# Altium PCB mergedPCBs.PcbDoc (part 3 of 4)
Units mil, origin at the board's own origin, x right, y up, seen from the top; angles counter-clockwise.
Board outline 7880 x 8510 mil, 2 copper layers (Top Layer, Bottom Layer); 381 components, 0 nets, 1142 pads, 205 vias.
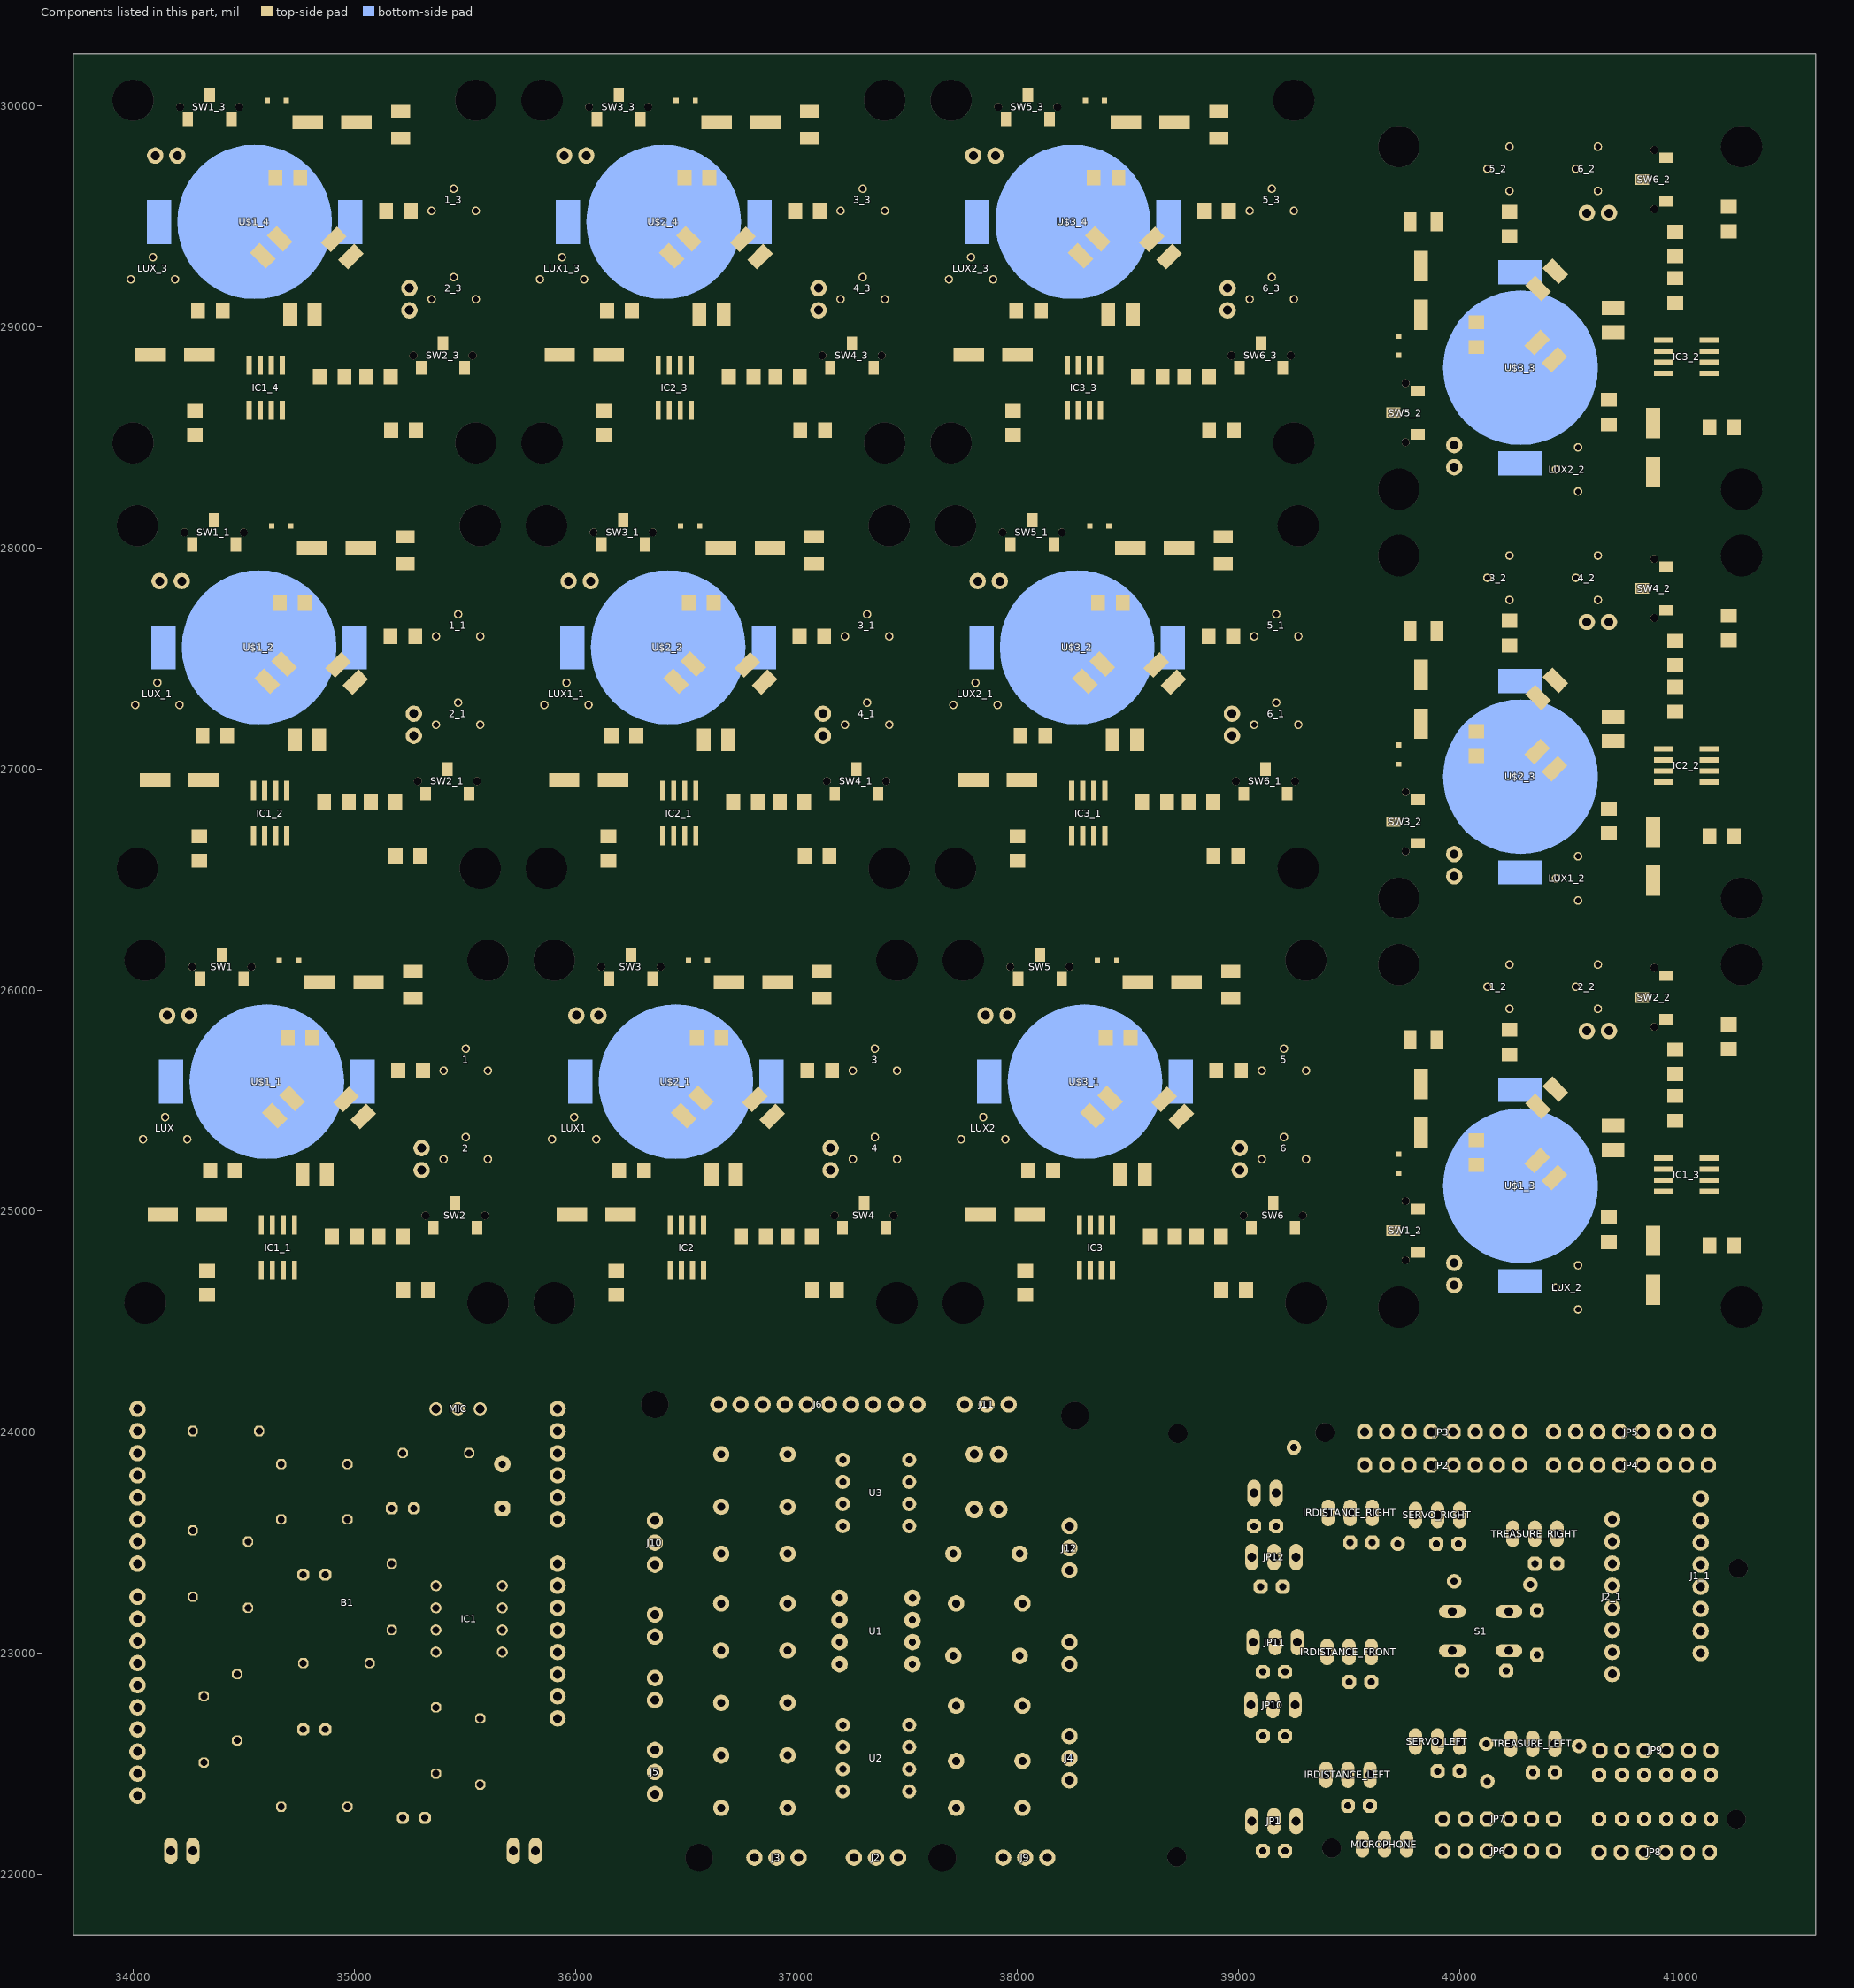
[diagram p3: the components of this part, seen from the top]

## Via types
v1: diameter 41.59/41.59 (per signal layer), hole 25.59, Top Layer to Bottom Layer, 168 vias
v2: diameter 34/34 (per signal layer), hole 20, Top Layer to Bottom Layer, 25 vias
v3: diameter 53.15/66 (per signal layer), hole 35.43, Top Layer to Bottom Layer, 12 vias

## Nets (pads, with @x,y where several pads share a name; then routed paths per layer and width w, separated by ;. In a path a pad name is that pad's centre, name@x,y a point inside that pad or via, vN(x,y) a via of type N, cw(c..) or ccw(c..) an arc to the next point about the centre after c; other vN are vias at no path point) (continued)
copper on no net: (continued)
  Top Layer w24: 33990,29215 34090,29315 34190,29315 34300,29425 34400,29425 34550,29575 ; v1(34000,28975) 34079.76,28895.24 ; 34010,27290 34110,27390 34210,27390 34320,27500 34420,27500 34570,27650 ; v1(34020,27050) 34099.76,26970.24 ; 34045,25325 34145,25425 34245,25425 34355,25535 34455,25535 34605,25685 ; v1(34055,25085) 34134.76,25005.24 ; 34170,22105 34175,22105 34175,22255 ; 34190,29215 34339.19,29215 ; 34210,27290 34359.19,27290 ; 34245,25325 34394.19,25325 ; 34270,23255 34310,23215 34310,22810 34320,22805 34175,22660 34175,22255 ; 34270,23555 34310,23515 34505,23515 ; 34280,28620.12 34280,28655 v1(34350,28725) ; 34300,26695.12 34300,26730 v1(34370,26800) ; 34300.24,28875 34300.24,29068.78 ; 34320,22505 34325,22510 34370,22510 34460,22600 34470,22605 34670,22405 34670,22305 ; 34320.24,26950 34320.24,27143.78 ; 34335,24730.12 34335,24765 v1(34405,24835) ; 34346.57,30050 34424.52,30050 v1(34438.72,30064.2) ; 34350,28875 34400,28825 34400,28728.64 ; v1(34350,29825) 34400,29775 34400,29725 34450,29675 34450,29575 34350,29475 34250,29475 34200,29425 34100,29425 33948,29273 33948,28727 34000,28675 34114.88,28675 34280,28509.88 34334.88,28509.88 34400,28575 34400,28728.64 ; 34355.24,24985 34355.24,25178.78 ; 34366.57,28125 34444.52,28125 v1(34458.72,28139.2) ; 34370,26950 34420,26900 34420,26803.64 ; v1(34370,27900) 34420,27850 34420,27800 34470,27750 34470,27650 34370,27550 34270,27550 34220,27500 34120,27500 33968,27348 33968,26802 34020,26750 34134.88,26750 34300,26584.88 34354.88,26584.88 34420,26650 34420,26803.64 ; v1(34400,28975) 34406.14,28968.86 34450,28968.86 34493.86,28968.86 ; 34400,29215 34339.19,29215 ; 34401,29213 34488,29126 34488,29032 34556,28963 35056,28963 35150,29075 35150,29375 34950,29575 34950,29657.85 ; 34401.57,26160 34479.52,26160 v1(34493.72,26174.2) ; 34405,24985 34455,24935 34455,24838.64 ; v1(34405,25935) 34455,25885 34455,25835 34505,25785 34505,25685 34405,25585 34305,25585 34255,25535 34155,25535 34003,25383 34003,24837 34055,24785 34169.88,24785 34335,24619.88 34389.88,24619.88 34455,24685 34455,24838.64 ; 34405.98,29075 34405.98,29148.21 34339.19,29215 ; v1(34420,27050) 34426.14,27043.86 34470,27043.86 34513.86,27043.86 ; 34420,27290 34359.19,27290 ; 34421,27288 34508,27201 34508,27107 34576,27038 35076,27038 35170,27150 35170,27450 34970,27650 34970,27732.85 ; 34425.98,27150 34425.98,27223.21 34359.19,27290 ; 34445,29939.76 34445,29930 34500,29875 34600,29875 34700,29975 34700,30018.31 34693.31,30025 ; v1(34455,25085) 34461.14,25078.86 34505,25078.86 34548.86,25078.86 ; 34455,25325 34394.19,25325 ; 34456,25323 34543,25236 34543,25142 34611,25073 35111,25073 35205,25185 35205,25485 35005,25685 35005,25767.85 ; 34460.98,25185 34460.98,25258.21 34394.19,25325 ; 34465,28014.76 34465,28005 34520,27950 34620,27950 34720,28050 34720,28093.31 34713.31,28100 ; 34470,22905 34475,22915 ; 34487.72,28975 34575,28887.72 34575,28827.36 ; 34500,26049.76 34500,26040 34555,25985 34655,25985 34755,26085 34755,26128.31 34748.31,26135 ; 34507.72,27050 34595,26962.72 34595,26902.36 ; 34520,23205 34520,23215 34625,23215 34760,23350 34770,23355 34820,23305 35370,23305 ; 34542.72,25085 34630,24997.72 34630,24937.36 ; v1(34558.94,29974.56) 34606.69,30022.31 ; 34575,28622.64 34575,28500 34600,28478 34704,28478 34762,28480 34806,28522 34833,28552 34900,28625 35000,28625 35050,28675 35050,28770.12 ; v1(34578.94,28049.56) 34626.69,28097.31 ; 34586.03,29321.03 34586.03,29338.97 34500,29425 34500,29525 34550,29575 ; 34595,26697.64 34595,26575 34620,26553 34724,26553 34782,26555 34826,26597 34853,26627 34920,26700 35020,26700 35070,26750 35070,26845.12 ; v1(34600,29075) 34692.81,29075 34710.74,29057.07 34710.74,29352.21 34663.97,29398.97 ; 34606.03,27396.03 34606.03,27413.97 34520,27500 34520,27600 34570,27650 ; 34606.69,30031.69 34650,30075 34950,30075 35000,30025 35000,29935.24 34950,29885.24 34950,29825 35144.02,29630.98 35144.02,29525 ; v1(34613.94,26084.56) 34661.69,26132.31 ; v1(34620,27150) 34712.81,27150 34730.74,27132.07 34730.74,27427.21 34683.97,27473.97 ; 34625,28622.64 34625,28550 ; 34625.19,28828.47 34625.55,28874.8 ; 34625.72,28896 34625.55,28874.8 ; 34626,28547 34625,28550 ; 34626.69,28106.69 34670,28150 34970,28150 35020,28100 35020,28010.24 34970,27960.24 34970,27900 35164.02,27705.98 35164.02,27600 ; 34630,24732.64 34630,24610 34655,24588 34759,24588 34817,24590 34861,24632 34888,24662 34955,24735 35055,24735 35105,24785 35105,24880.12 ; 34641.03,25431.03 34641.03,25448.97 34555,25535 34555,25635 34605,25685 ; 34645,26697.64 34645,26625 ; 34645.19,26903.47 34645.55,26949.8 ; 34645.72,26971 34645.55,26949.8 ; 34646,26622 34645,26625 ; v1(34655,25185) 34747.81,25185 34765.74,25167.07 34765.74,25462.21 34718.97,25508.97 ; 34661.69,26141.69 34705,26185 35005,26185 35055,26135 35055,26045.24 35005,25995.24 35005,25935 35199.02,25740.98 35199.02,25635 ; v1(34664,29853) 34750,29925 ; 34670,23855 34670,23680 34505,23515 ; 34675,28622.64 34697.64,28622.64 34745.5,28672.29 ; 34675,28827.36 v1@34740.84,28827.36 ; 34680,24732.64 34680,24660 ; 34680.19,24938.47 34680.55,24984.8 ; 34680.72,25006 34680.55,24984.8 ; 34681,24657 34680,24660 ; v1(34684,27928) 34770,28000 ; 34695,26697.64 34717.64,26697.64 34765.5,26747.29 ; 34695,26902.36 v1@34760.84,26902.36 ; v1(34719,25963) 34805,26035 ; 34730,24732.64 34752.64,24732.64 34800.5,24782.29 ; 34730,24937.36 v1@34795.84,24937.36 ; 34770,22655 34775,22645 34955,22465 35360,22465 35370,22455 ; 34770,22955 34737.5,22922.5 ; 34820.98,29057.07 34820.98,29308.07 34908.1,29395.19 ; 34840.98,27132.07 34840.98,27383.07 34928.1,27470.19 ; 34850,28769.02 34850,28735.4 ; 34870,22655 34865,22660 34865,22795 34737.5,22922.5 ; 34870,26844.02 34870,26810.4 ; 34875.98,25167.07 34875.98,25418.07 34963.1,25505.19 ; 34905,24879.02 34905,24845.4 ; 34908.1,29410.92 34908.1,29395.19 ; 34928.1,27485.92 34928.1,27470.19 ; v1(34950,28675) 34910.4,28675 34850,28735.4 ; 34950,28780.98 34950,28824.03 ; 34950,28825 34916,28856 34816,28856 34778,28823 34777,28711 34745.5,28672.29 ; 34963.1,25520.92 34963.1,25505.19 ; 34970,22305 34970,22300 35165,22300 35210,22255 35220,22255 ; 34970,23855 34970,23605 34850,23605 34475,23230 34475,22915 ; v1(34970,26750) 34930.4,26750 34870,26810.4 ; 34970,26855.98 34970,26899.03 ; 34970,26900 34936,26931 34836,26931 34798,26898 34797,26786 34765.5,26747.29 ; 34984.21,28897 34991.74,28889.47 ; 34986.05,29317.24 34993.81,29325 35000,29325 35100,29225 v1(35100,29125) ; 35004.21,26972 35011.74,26964.47 ; v1(35005,24785) 34965.4,24785 34905,24845.4 ; 35005,24890.98 35005,24934.03 ; 35005,24935 34971,24966 34871,24966 34833,24933 34832,24821 34800.5,24782.29 ; 35006.05,27392.24 35013.81,27400 35020,27400 35120,27300 v1(35120,27200) ; 35039.21,25007 35046.74,24999.47 ; 35041.05,25427.24 35048.81,25435 35055,25435 35155,25335 v1(35155,25235) ; 35054.88,28775 35054.88,28826.33 35004.45,28876.76 ; 35074.88,26850 35074.88,26901.33 35024.45,26951.76 ; v1(35100,29775) 35177.95,29852.95 ; 35109.88,24885 35109.88,24936.33 35059.45,24986.76 ; v1(35120,27850) 35197.95,27927.95 ; v1(35150,28625) 35167.02,28607.98 35167.02,28533 ; v1(35155,25885) 35232.95,25962.95 ; 35165.12,28775 35165.12,28709.88 v1(35200,28675) ; 35170,23105 35180,23110 35270,23110 35277.5,23117.5 ; 35170,23405 35180,23410 35180,23650 35170,23655 ; v1(35170,26700) 35187.02,26682.98 35187.02,26608 ; 35185.12,26850 35185.12,26784.88 v1(35220,26750) ; v1(35205,24735) 35222.02,24717.98 35222.02,24643 ; 35220,23905 35225,23905 35225,23965 35360,24100 35370,24105 ; 35220.12,24885 35220.12,24819.88 v1(35255,24785) ; 35250,29975 35350,29875 35350,29725 35255.98,29630.98 35255.98,29525 ; 35270,23655 35270,23665 35465,23860 35465,24100 35470,24105 ; 35270,28050 35370,27950 35370,27800 35275.98,27705.98 35275.98,27600 ; 35300,28525 35358.5,28583.5 ; 35303.15,28828.15 35350,28875 35350,29125 35450,29225 ; 35305,26085 35405,25985 35405,25835 35310.98,25740.98 35310.98,25635 ; 35320,22255 35330,22255 35570,22015 35735,22015 35780,22060 35780,22075 35810,22105 35820,22105 ; 35320,26600 35378.5,26658.5 ; 35323.15,26903.15 35370,26950 35370,27200 35470,27300 ; 35355,24635 35413.5,24693.5 ; 35358.15,24938.15 35405,24985 35405,25235 35505,25335 ; 35358.5,28583.61 35441.39,28666.5 35491.5,28666.5 35600,28775 35600,28841.51 ; 35370,23005 35375,23005 35375,22825 35577.5,22622.5 ; 35370,23205 35360,23200 35277.5,23117.5 ; 35378.5,26658.61 35461.39,26741.5 35511.5,26741.5 35620,26850 35620,26916.51 ; 35401.57,28925 35401.57,28796.75 35400,28795.17 35400,28725 35350,28675 35300,28675 35250,28725 35250,28794.66 35202,28842.66 35202,28873 35150,28925 35052.69,28925 35004.45,28876.76 ; 35413.5,24693.61 35496.39,24776.5 35546.5,24776.5 35655,24885 35655,24951.51 ; 35421.57,27000 35421.57,26871.75 35420,26870.17 35420,26800 35370,26750 35320,26750 35270,26800 35270,26869.66 35222,26917.66 35222,26948 35170,27000 35072.69,27000 35024.45,26951.76 ; 35450,29625 35350,29525 35350,29475 35500,29325 35500,29125 35463,29081 35463,28881 35500,28825 ; 35456.57,25035 35456.57,24906.75 35455,24905.17 35455,24835 35405,24785 35355,24785 35305,24835 35305,24904.66 35257,24952.66 35257,24983 35205,25035 35107.69,25035 35059.45,24986.76 ; 35470,27700 35370,27600 35370,27550 35520,27400 35520,27200 35483,27156 35483,26956 35520,26900 ; 35505,25735 35405,25635 35405,25585 35555,25435 35555,25235 35518,25191 35518,24991 35555,24935 ; 35520,23905 35570,23905 ; 35550,29525 35600,29475 35600,29175 35550,29125 35600,29075 35600,28898.25 ; 35570,22405 35570,22480 35285,22765 35285,23110 35277.5,23117.5 ; 35570,22705 35570,22870 35375,23065 35375,23095 35370,23105 35420,23155 35420,23485 35735,23800 35915,23800 35920,23805 ; 35570,24105 35570,23905 ; 35570,27600 35620,27550 35620,27250 35570,27200 35620,27150 35620,26973.25 ; 35601.15,28842.66 35601.15,28897.1 ; 35605,25635 35655,25585 35655,25285 35605,25235 35655,25185 35655,25008.25 ; 35621.15,26917.66 35621.15,26972.1 ; 35656.15,24952.66 35656.15,25007.1 ; 35670,23005 35675,23005 35675,23035 35855,23265 35855,23455 35995,23553.82 35995,23665.71 35920,23705 ; 35670,23305 35660,23305 35565,23260 35615,22940 35645,22910 35640,22910 35670,22890 35720,22955 35920,23205 ; 35670,23655 35720,23605 35920,23605 ; 35670,23855 35660,23860 35615,23905 35570,23905 ; 35720,22105 35720,22360 ; 35840,29215 35940,29315 36040,29315 36150,29425 36250,29425 36400,29575 ; v1(35850,28975) 35929.76,28895.24 ; 35860,27290 35960,27390 36060,27390 36170,27500 36270,27500 36420,27650 ; v1(35870,27050) 35949.76,26970.24 ; 35895,25325 35995,25425 36095,25425 36205,25535 36305,25535 36455,25685 ; v1(35905,25085) 35984.76,25005.24 ; 35920,23105 35915,23095 35665,22745 35615,22660 35577.5,22622.5 ; 36040,29215 36189.19,29215 ; 36060,27290 36209.19,27290 ; 36095,25325 36244.19,25325 ; 36130,28620.12 36130,28655 v1(36200,28725) ; 36150,26695.12 36150,26730 v1(36220,26800) ; 36150.24,28875 36150.24,29068.78 ; 36170.24,26950 36170.24,27143.78 ; 36185,24730.12 36185,24765 v1(36255,24835) ; 36196.57,30050 36274.52,30050 v1(36288.72,30064.2) ; 36200,28875 36250,28825 36250,28728.64 ; v1(36200,29825) 36250,29775 36250,29725 36300,29675 36300,29575 36200,29475 36100,29475 36050,29425 35950,29425 35798,29273 35798,28727 35850,28675 35964.88,28675 36130,28509.88 36184.88,28509.88 36250,28575 36250,28728.64 ; 36205.24,24985 36205.24,25178.78 ; 36216.57,28125 36294.52,28125 v1(36308.72,28139.2) ; 36220,26950 36270,26900 36270,26803.64 ; v1(36220,27900) 36270,27850 36270,27800 36320,27750 36320,27650 36220,27550 36120,27550 36070,27500 35970,27500 35818,27348 35818,26802 35870,26750 35984.88,26750 36150,26584.88 36204.88,26584.88 36270,26650 36270,26803.64 ; v1(36250,28975) 36256.14,28968.86 36300,28968.86 36343.86,28968.86 ; 36250,29215 36189.19,29215 ; 36251,29213 36338,29126 36338,29032 36406,28963 36906,28963 37000,29075 37000,29375 36800,29575 36800,29657.85 ; 36251.57,26160 36329.52,26160 v1(36343.72,26174.2) ; 36255,24985 36305,24935 36305,24838.64 ; v1(36255,25935) 36305,25885 36305,25835 36355,25785 36355,25685 36255,25585 36155,25585 36105,25535 36005,25535 35853,25383 35853,24837 35905,24785 36019.88,24785 36185,24619.88 36239.88,24619.88 36305,24685 36305,24838.64 ; 36255.98,29075 36255.98,29148.21 36189.19,29215 ; v1(36270,27050) 36276.14,27043.86 36320,27043.86 36363.86,27043.86 ; 36270,27290 36209.19,27290 ; 36271,27288 36358,27201 36358,27107 36426,27038 36926,27038 37020,27150 37020,27450 36820,27650 36820,27732.85 ; 36275.98,27150 36275.98,27223.21 36209.19,27290 ; 36295,29939.76 36295,29930 36350,29875 36450,29875 36550,29975 36550,30018.31 36543.31,30025 ; v1(36305,25085) 36311.14,25078.86 36355,25078.86 36398.86,25078.86 ; 36305,25325 36244.19,25325 ; 36306,25323 36393,25236 36393,25142 36461,25073 36961,25073 37055,25185 37055,25485 36855,25685 36855,25767.85 ; 36310.98,25185 36310.98,25258.21 36244.19,25325 ; 36315,28014.76 36315,28005 36370,27950 36470,27950 36570,28050 36570,28093.31 36563.31,28100 ; 36337.72,28975 36425,28887.72 36425,28827.36 ; 36350,26049.76 36350,26040 36405,25985 36505,25985 36605,26085 36605,26128.31 36598.31,26135 ; 36357.72,27050 36445,26962.72 36445,26902.36 ; 36360,22362.5 36370,22360 36430,22300 36660,22300 36715,22300 ; 36360,22462.5 36370,22465 36595,22465 36655,22525 36660,22537.5 ; 36360,22562.5 36355,22570 36355,22780 36360,22787.5 36370,22795 36415,22840 36415,22915 36370,22960 36370,23065 36360,23075 ; 36360,23175 36370,23170 36415,23170 ; 36360,23500 36370,23500 36370,23470 36415,23425 36415,23170 ; 36392.72,25085 36480,24997.72 36480,24937.36 ; v1(36408.94,29974.56) 36456.69,30022.31 ; 36425,28622.64 36425,28500 36450,28478 36554,28478 36612,28480 36656,28522 36683,28552 36750,28625 36850,28625 36900,28675 36900,28770.12 ; v1(36428.94,28049.56) 36476.69,28097.31 ; 36436.03,29321.03 36436.03,29338.97 36350,29425 36350,29525 36400,29575 ; 36445,26697.64 36445,26575 36470,26553 36574,26553 36632,26555 36676,26597 36703,26627 36770,26700 36870,26700 36920,26750 36920,26845.12 ; v1(36450,29075) 36542.81,29075 36560.74,29057.07 36560.74,29352.21 36513.97,29398.97 ; 36456.03,27396.03 36456.03,27413.97 36370,27500 36370,27600 36420,27650 ; 36456.69,30031.69 36500,30075 36800,30075 36850,30025 36850,29935.24 36800,29885.24 36800,29825 36994.02,29630.98 36994.02,29525 ; v1(36463.94,26084.56) 36511.69,26132.31 ; v1(36470,27150) 36562.81,27150 36580.74,27132.07 36580.74,27427.21 36533.97,27473.97 ; 36475,28622.64 36475,28550 ; 36475.19,28828.47 36475.55,28874.8 ; 36475.72,28896 36475.55,28874.8 ; 36476,28547 36475,28550 ; 36476.69,28106.69 36520,28150 36820,28150 36870,28100 36870,28010.24 36820,27960.24 36820,27900 37014.02,27705.98 37014.02,27600 ; 36480,24732.64 36480,24610 36505,24588 36609,24588 36667,24590 36711,24632 36738,24662 36805,24735 36905,24735 36955,24785 36955,24880.12 ; 36491.03,25431.03 36491.03,25448.97 36405,25535 36405,25635 36455,25685 ; 36495,26697.64 36495,26625 ; 36495.19,26903.47 36495.55,26949.8 ; 36495.72,26971 36495.55,26949.8 ; 36496,26622 36495,26625 ; v1(36505,25185) 36597.81,25185 36615.74,25167.07 36615.74,25462.21 36568.97,25508.97 ; 36511.69,26141.69 36555,26185 36855,26185 36905,26135 36905,26045.24 36855,25995.24 36855,25935 37049.02,25740.98 37049.02,25635 ; v1(36514,29853) 36600,29925 ; 36525,28622.64 36547.64,28622.64 36595.5,28672.29 ; 36525,28827.36 v1@36590.84,28827.36 ; 36530,24732.64 36530,24660 ; 36530.19,24938.47 36530.55,24984.8 ; 36530.72,25006 36530.55,24984.8 ; 36531,24657 36530,24660 ; v1(36534,27928) 36620,28000 ; 36545,26697.64 36567.64,26697.64 36615.5,26747.29 ; 36545,26902.36 v1@36610.84,26902.36 ; v2(36565,23665) 36565,23935 36640,24010 36640,24115 36647.5,24125 ; v1(36569,25963) 36655,26035 ; 36580,24732.64 36602.64,24732.64 36650.5,24782.29 ; 36580,24937.36 v1@36645.84,24937.36 ; 36660,23225 36595,23290 36595,23470 36655,23530 36655,23650 36660,23662.5 ; 36660,23450 36670,23455 36775,23560 v2(36775,23845) ; 36660,23900 36670,23905 36835,23905 37045,24115 37047.5,24125 37060,24115 37210,23965 37210,23875 ; 36670.98,29057.07 36670.98,29308.07 36758.1,29395.19 ; 36690.98,27132.07 36690.98,27383.07 36778.1,27470.19 ; 36700,28769.02 36700,28735.4 ; 36720,26844.02 36720,26810.4 ; 36725.98,25167.07 36725.98,25418.07 36813.1,25505.19 ; v2(36730,23725) 36595,23860 36595,23920 36745,24070 36745,24115 36747.5,24125 ; 36755,24879.02 36755,24845.4 ; 36758.1,29410.92 36758.1,29395.19 ; v2(36775,22885) 37075,22885 v2(37120,22840) ; 36778.1,27485.92 36778.1,27470.19 ; v1(36800,28675) 36760.4,28675 36700,28735.4 ; 36800,28780.98 36800,28824.03 ; 36800,28825 36766,28856 36666,28856 36628,28823 36627,28711 36595.5,28672.29 ; 36813.1,25520.92 36813.1,25505.19 ; v1(36820,26750) 36780.4,26750 36720,26810.4 ; 36820,26855.98 36820,26899.03 ; 36820,26900 36786,26931 36686,26931 36648,26898 36647,26786 36615.5,26747.29 ; 36834.21,28897 36841.74,28889.47 ; 36836.05,29317.24 36843.81,29325 36850,29325 36950,29225 v1(36950,29125) ; v2(36850,23500) 36850,23875 36990,24015 v2(37047.5,24015) ; 36854.21,26972 36861.74,26964.47 ; v1(36855,24785) 36815.4,24785 36755,24845.4 ; 36855,24890.98 36855,24934.03 ; 36855,24935 36821,24966 36721,24966 36683,24933 36682,24821 36650.5,24782.29 ; 36856.05,27392.24 36863.81,27400 36870,27400 36970,27300 v1(36970,27200) ; 36889.21,25007 36896.74,24999.47 ; 36891.05,25427.24 36898.81,25435 36905,25435 37005,25335 v1(37005,25235) ; v2(36895,23845) 37022.5,23717.5 ; 36904.88,28775 36904.88,28826.33 36854.45,28876.76 ; 36910,22075 37090,22255 v2(37330,22255) ; 36924.88,26850 36924.88,26901.33 36874.45,26951.76 ; v1(36950,29775) 37027.95,29852.95 ; 36959.88,24885 36959.88,24936.33 36909.45,24986.76 ; 36960,22300 37525,22300 v2(37585,22360) ; 36960,22537.5 36955,22540 36895,22540 36660,22775 36670,22780 36670,22855 37480,23665 37510,23665 37510,23675 ; 36960,23012.5 36970,23005 37060,23005 37180,22885 37270,22885 v2(37420,23035) ; 36960,23662.5 36970,23665 37022.5,23717.5 ; 36960,23900 37075,23785 37210,23785 37210,23775 ; v1(36970,27850) 37047.95,27927.95 ; v1(37000,28625) 37017.02,28607.98 37017.02,28533 ; v1(37005,25885) 37082.95,25962.95 ; 37010,22075 37260,22075 ; 37015.12,28775 37015.12,28709.88 v1(37050,28675) ; v1(37020,26700) 37037.02,26682.98 37037.02,26608 ; v2(37030,22750) 37210,22750 37435,22525 v2(37590,22525) ; v2(37030,23110) 37060,23110 37195,23245 37195,23250 ; 37035.12,26850 37035.12,26784.88 v1(37070,26750) ; v1(37055,24735) 37072.02,24717.98 37072.02,24643 ; 37070.12,24885 37070.12,24819.88 v1(37105,24785) ; 37100,29975 37200,29875 37200,29725 37105.98,29630.98 37105.98,29525 ; 37120,28050 37220,27950 37220,27800 37125.98,27705.98 37125.98,27600 ; 37147.5,24125 37150,24115 37480,23785 37510,23785 37510,23775 ; 37150,28525 37208.5,28583.5 ; 37153.15,28828.15 37200,28875 37200,29125 37300,29225 ; 37155,26085 37255,25985 37255,25835 37160.98,25740.98 37160.98,25635 ; 37170,26600 37228.5,26658.5 ; 37173.15,26903.15 37220,26950 37220,27200 37320,27300 ; 37195,23150 37195,23155 37525,23485 37540,23485 37795,23740 37795,23890 37805,23900 ; 37205,24635 37263.5,24693.5 ; 37208.15,24938.15 37255,24985 37255,25235 37355,25335 ; 37208.5,28583.61 37291.39,28666.5 37341.5,28666.5 37450,28775 37450,28841.51 ; 37210,22475 37210,22375 ; 37210,23675 37210,23575 36655,23020 ; 37228.5,26658.61 37311.39,26741.5 37361.5,26741.5 37470,26850 37470,26916.51 ; 37247.5,24125 37255,24115 37405,23965 37945,23965 37975,23935 37975,23500 37795,23320 v2(37795,22555) ; 37251.57,28925 37251.57,28796.75 37250,28795.17 37250,28725 37200,28675 37150,28675 37100,28725 37100,28794.66 37052,28842.66 37052,28873 37000,28925 36902.69,28925 36854.45,28876.76 ; 37263.5,24693.61 37346.39,24776.5 37396.5,24776.5 37505,24885 37505,24951.51 ; 37271.57,27000 37271.57,26871.75 37270,26870.17 37270,26800 37220,26750 37170,26750 37120,26800 37120,26869.66 37072,26917.66 37072,26948 37020,27000 36922.69,27000 36874.45,26951.76 ; 37300,29625 37200,29525 37200,29475 37350,29325 37350,29125 37313,29081 37313,28881 37350,28825 ; 37306.57,25035 37306.57,24906.75 37305,24905.17 37305,24835 37255,24785 37205,24785 37155,24835 37155,24904.66 37107,24952.66 37107,24983 37055,25035 36957.69,25035 36909.45,24986.76 ; 37320,27700 37220,27600 37220,27550 37370,27400 37370,27200 37333,27156 37333,26956 37370,26900 ; 37355,25735 37255,25635 37255,25585 37405,25435 37405,25235 37368,25191 37368,24991 37405,24935 ; 37360,22075 37735,22450 37750,22450 37945,22645 37945,23380 38005,23440 38010,23450 ; v2(37360,22540) 37390,22510 v2(37390,22420) ; 37400,29525 37450,29475 37450,29175 37400,29125 37450,29075 37450,28898.25 ; 37420,27600 37470,27550 37470,27250 37420,27200 37470,27150 37470,26973.25 ; 37447.5,24125 37450,24115 37495,24070 37705,24070 37760,24125 ; 37451.15,28842.66 37451.15,28897.1 ; 37455,25635 37505,25585 37505,25285 37455,25235 37505,25185 37505,25008.25 ; 37460,22075 37465,22075 37465,22135 37750,22420 37780,22420 37870,22510 37900,22510 37930,22480 37930,22300 37990,22240 38140,22240 ; 37471.15,26917.66 37471.15,26972.1 ; 37506.15,24952.66 37506.15,25007.1 ; 37510,22375 37210,22375 ; 37510,22575 37510,22585 37435,22585 37075,22945 36940,22945 36895,22990 36895,23035 37375,23515 37525,23515 37570,23560 37570,23695 37540,23725 37030,23725 37022.5,23717.5 ; 37510,22675 37510,22885 37465,22930 37465,23185 37525,23245 37525,23250 ; 37525,22950 37525,22945 37540,22930 37540,22825 37720,22645 37720,22525 37722.5,22512.5 ; 37525,23050 37645,23170 37645,23500 37795,23650 37805,23650 ; 37525,23150 37525,23155 37600,23230 v2(37600,23485) ; v2(37615,22810) 37615,22885 37705,22975 37710,22987.5 ; 37690,29215 37790,29315 37890,29315 38000,29425 38100,29425 38250,29575 ; v1(37700,28975) 37779.76,28895.24 ; 37710,27290 37810,27390 37910,27390 38020,27500 38120,27500 38270,27650 ; v2(37720,23380) 37915,23575 37915,23650 ; v1(37720,27050) 37799.76,26970.24 ; 37745,25325 37845,25425 37945,25425 38055,25535 38155,25535 38305,25685 ; v1(37755,25085) 37834.76,25005.24 ; 37860,24125 38170,23815 38170,23545 38230,23485 38235,23475 38245,23470 38290,23425 38290,22765 38170,22645 38170,22495 38230,22435 38235,22425 ; v2(37885,22465) 37885,22120 37930,22075 37935,22075 ; 37890,29215 38039.19,29215 ; 37910,27290 38059.19,27290 ; 37945,25325 38094.19,25325 ; v2(37975,22375) 38050,22450 v2(38155,22450) ; 37980,28620.12 37980,28655 v1(38050,28725) ; 38000,26695.12 38000,26730 v1(38070,26800) ; 38000.24,28875 38000.24,29068.78 ; 38020.24,26950 38020.24,27143.78 ; 38035,24730.12 38035,24765 v1(38105,24835) ; 38046.57,30050 38124.52,30050 v1(38138.72,30064.2) ; 38050,28875 38100,28825 38100,28728.64 ; v1(38050,29825) 38100,29775 38100,29725 38150,29675 38150,29575 38050,29475 37950,29475 37900,29425 37800,29425 37648,29273 37648,28727 37700,28675 37814.88,28675 37980,28509.88 38034.88,28509.88 38100,28575 38100,28728.64 ; 38055.24,24985 38055.24,25178.78 ; 38066.57,28125 38144.52,28125 v1(38158.72,28139.2) ; 38070,26950 38120,26900 38120,26803.64 ; v1(38070,27900) 38120,27850 38120,27800 38170,27750 38170,27650 38070,27550 37970,27550 37920,27500 37820,27500 37668,27348 37668,26802 37720,26750 37834.88,26750 38000,26584.88 38054.88,26584.88 38120,26650 38120,26803.64 ; v1(38100,28975) 38106.14,28968.86 38150,28968.86 38193.86,28968.86 ; 38100,29215 38039.19,29215 ; 38101,29213 38188,29126 38188,29032 38256,28963 38756,28963 38850,29075 38850,29375 38650,29575 38650,29657.85 ; 38101.57,26160 38179.52,26160 v1(38193.72,26174.2) ; 38105,24985 38155,24935 38155,24838.64 ; v1(38105,25935) 38155,25885 38155,25835 38205,25785 38205,25685 38105,25585 38005,25585 37955,25535 37855,25535 37703,25383 37703,24837 37755,24785 37869.88,24785 38035,24619.88 38089.88,24619.88 38155,24685 38155,24838.64 ; 38105.98,29075 38105.98,29148.21 38039.19,29215 ; v2(38110,22930) 38230,23050 38235,23050 38215,23050 38125,23140 v2(38125,23680) ; v1(38120,27050) 38126.14,27043.86 38170,27043.86 38213.86,27043.86 ; 38120,27290 38059.19,27290 ; 38121,27288 38208,27201 38208,27107 38276,27038 38776,27038 38870,27150 38870,27450 38670,27650 38670,27732.85 ; 38125.98,27150 38125.98,27223.21 38059.19,27290 ; 38135,22075 38140,22075 38140,22240 ; 38145,29939.76 38145,29930 38200,29875 38300,29875 38400,29975 38400,30018.31 38393.31,30025 ; v1(38155,25085) 38161.14,25078.86 38205,25078.86 38248.86,25078.86 ; 38155,25325 38094.19,25325 ; 38156,25323 38243,25236 38243,25142 38311,25073 38811,25073 38905,25185 38905,25485 38705,25685 38705,25767.85 ; 38160.98,25185 38160.98,25258.21 38094.19,25325 ; 38165,28014.76 38165,28005 38220,27950 38320,27950 38420,28050 38420,28093.31 38413.31,28100 ; 38187.72,28975 38275,28887.72 38275,28827.36 ; 38200,26049.76 38200,26040 38255,25985 38355,25985 38455,26085 38455,26128.31 38448.31,26135 ; 38207.72,27050 38295,26962.72 38295,26902.36 ; 38235,22625 38290,22570 38290,22390 38140,22240 ; 38242.72,25085 38330,24997.72 38330,24937.36 ; v1(38258.94,29974.56) 38306.69,30022.31 ; 38275,28622.64 38275,28500 38300,28478 38404,28478 38462,28480 38506,28522 38533,28552 38600,28625 38700,28625 38750,28675 38750,28770.12 ; v1(38278.94,28049.56) 38326.69,28097.31 ; 38286.03,29321.03 38286.03,29338.97 38200,29425 38200,29525 38250,29575 ; 38295,26697.64 38295,26575 38320,26553 38424,26553 38482,26555 38526,26597 38553,26627 38620,26700 38720,26700 38770,26750 38770,26845.12 ; v1(38300,29075) 38392.81,29075 38410.74,29057.07 38410.74,29352.21 38363.97,29398.97 ; 38306.03,27396.03 38306.03,27413.97 38220,27500 38220,27600 38270,27650 ; 38306.69,30031.69 38350,30075 38650,30075 38700,30025 38700,29935.24 38650,29885.24 38650,29825 38844.02,29630.98 38844.02,29525 ; v1(38313.94,26084.56) 38361.69,26132.31 ; v1(38320,27150) 38412.81,27150 38430.74,27132.07 38430.74,27427.21 38383.97,27473.97 ; 38325,28622.64 38325,28550 ; 38325.19,28828.47 38325.55,28874.8 ; 38325.72,28896 38325.55,28874.8 ; 38326,28547 38325,28550 ; 38326.69,28106.69 38370,28150 38670,28150 38720,28100 38720,28010.24 38670,27960.24 38670,27900 38864.02,27705.98 38864.02,27600 ; 38330,24732.64 38330,24610 38355,24588 38459,24588 38517,24590 38561,24632 38588,24662 38655,24735 38755,24735 38805,24785 38805,24880.12 ; 38341.03,25431.03 38341.03,25448.97 38255,25535 38255,25635 38305,25685 ; 38345,26697.64 38345,26625 ; 38345.19,26903.47 38345.55,26949.8 ; 38345.72,26971 38345.55,26949.8 ; 38346,26622 38345,26625 ; v1(38355,25185) 38447.81,25185 38465.74,25167.07 38465.74,25462.21 38418.97,25508.97 ; 38361.69,26141.69 38405,26185 38705,26185 38755,26135 38755,26045.24 38705,25995.24 38705,25935 38899.02,25740.98 38899.02,25635 ; v1(38364,29853) 38450,29925 ; 38375,28622.64 38397.64,28622.64 38445.5,28672.29 ; 38375,28827.36 v1@38440.84,28827.36 ; 38380,24732.64 38380,24660 ; 38380.19,24938.47 38380.55,24984.8 ; 38380.72,25006 38380.55,24984.8 ; 38381,24657 38380,24660 ; v1(38384,27928) 38470,28000 ; 38395,26697.64 38417.64,26697.64 38465.5,26747.29 ; 38395,26902.36 v1@38460.84,26902.36 ; v1(38419,25963) 38505,26035 ; 38430,24732.64 38452.64,24732.64 38500.5,24782.29 ; 38430,24937.36 v1@38495.84,24937.36 ; 38520.98,29057.07 38520.98,29308.07 38608.1,29395.19 ; 38540.98,27132.07 38540.98,27383.07 38628.1,27470.19 ; 38550,28769.02 38550,28735.4 ; 38570,26844.02 38570,26810.4 ; 38575.98,25167.07 38575.98,25418.07 38663.1,25505.19 ; 38605,24879.02 38605,24845.4 ; 38608.1,29410.92 38608.1,29395.19 ; 38628.1,27485.92 38628.1,27470.19 ; v1(38650,28675) 38610.4,28675 38550,28735.4 ; 38650,28780.98 38650,28824.03 ; 38650,28825 38616,28856 38516,28856 38478,28823 38477,28711 38445.5,28672.29 ; 38663.1,25520.92 38663.1,25505.19 ; v1(38670,26750) 38630.4,26750 38570,26810.4 ; 38670,26855.98 38670,26899.03 ; 38670,26900 38636,26931 38536,26931 38498,26898 38497,26786 38465.5,26747.29 ; 38684.21,28897 38691.74,28889.47 ; 38686.05,29317.24 38693.81,29325 38700,29325 38800,29225 v1(38800,29125) ; 38704.21,26972 38711.74,26964.47 ; v1(38705,24785) 38665.4,24785 38605,24845.4 ; 38705,24890.98 38705,24934.03 ; 38705,24935 38671,24966 38571,24966 38533,24933 38532,24821 38500.5,24782.29 ; 38706.05,27392.24 38713.81,27400 38720,27400 38820,27300 v1(38820,27200) ; 38739.21,25007 38746.74,24999.47 ; 38741.05,25427.24 38748.81,25435 38755,25435 38855,25335 v1(38855,25235) ; 38754.88,28775 38754.88,28826.33 38704.45,28876.76 ; 38774.88,26850 38774.88,26901.33 38724.45,26951.76 ; v1(38800,29775) 38877.95,29852.95 ; 38809.88,24885 38809.88,24936.33 38759.45,24986.76 ; v1(38820,27850) 38897.95,27927.95 ; v1(38850,28625) 38867.02,28607.98 38867.02,28533 ; v1(38855,25885) 38932.95,25962.95 ; 38865.12,28775 38865.12,28709.88 v1(38900,28675) ; v1(38870,26700) 38887.02,26682.98 38887.02,26608 ; 38885.12,26850 38885.12,26784.88 v1(38920,26750) ; v1(38905,24735) 38922.02,24717.98 38922.02,24643 ; 38920.12,24885 38920.12,24819.88 v1(38955,24785) ; 38950,29975 39050,29875 39050,29725 38955.98,29630.98 38955.98,29525 ; 38970,28050 39070,27950 39070,27800 38975.98,27705.98 38975.98,27600 ; 39000,28525 39058.5,28583.5 ; 39003.15,28828.15 39050,28875 39050,29125 39150,29225 ; 39005,26085 39105,25985 39105,25835 39010.98,25740.98 39010.98,25635 ; 39020,26600 39078.5,26658.5 ; 39023.15,26903.15 39070,26950 39070,27200 39170,27300 ; 39055,24635 39113.5,24693.5 ; 39058.15,24938.15 39105,24985 39105,25235 39205,25335 ; 39058.5,28583.61 39141.39,28666.5 39191.5,28666.5 39300,28775 39300,28841.51 ; 39078.5,26658.61 39161.39,26741.5 39211.5,26741.5 39320,26850 39320,26916.51 ; 39101.57,28925 39101.57,28796.75 39100,28795.17 39100,28725 39050,28675 39000,28675 38950,28725 38950,28794.66 38902,28842.66 38902,28873 38850,28925 38752.69,28925 38704.45,28876.76 ; 39113.5,24693.61 39196.39,24776.5 39246.5,24776.5 39355,24885 39355,24951.51 ; 39121.57,27000 39121.57,26871.75 39120,26870.17 39120,26800 39070,26750 39020,26750 38970,26800 38970,26869.66 38922,26917.66 38922,26948 38870,27000 38772.69,27000 38724.45,26951.76 ; 39150,29625 39050,29525 39050,29475 39200,29325 39200,29125 39163,29081 39163,28881 39200,28825 ; 39156.57,25035 39156.57,24906.75 39155,24905.17 39155,24835 39105,24785 39055,24785 39005,24835 39005,24904.66 38957,24952.66 38957,24983 38905,25035 38807.69,25035 38759.45,24986.76 ; 39170,27700 39070,27600 39070,27550 39220,27400 39220,27200 39183,27156 39183,26956 39220,26900 ; 39205,25735 39105,25635 39105,25585 39255,25435 39255,25235 39218,25191 39218,24991 39255,24935 ; 39250,29525 39300,29475 39300,29175 39250,29125 39300,29075 39300,28898.25 ; 39270,27600 39320,27550 39320,27250 39270,27200 39320,27150 39320,26973.25 ; 39301.15,28842.66 39301.15,28897.1 ; 39305,25635 39355,25585 39355,25285 39305,25235 39355,25185 39355,25008.25 ; 39321.15,26917.66 39321.15,26972.1 ; 39356.15,24952.66 39356.15,25007.1 ; v1(39685.8,25003.72) 39700,24989.52 39700,24911.57 ; v1(39685.8,26853.72) 39700,26839.52 39700,26761.57 ; v1(39685.8,28703.72) 39700,28689.52 39700,28611.57 ; 39718.31,25171.69 39675,25215 39675,25515 39725,25565 39814.76,25565 39864.76,25515 39925,25515 40119.02,25709.02 40225,25709.02 ; 39718.31,27021.69 39675,27065 39675,27365 39725,27415 39814.76,27415 39864.76,27365 39925,27365 40119.02,27559.02 40225,27559.02 ; 39718.31,28871.69 39675,28915 39675,29215 39725,29265 39814.76,29265 39864.76,29215 39925,29215 40119.02,29409.02 40225,29409.02 ; 39725,25258.31 39731.69,25265 39775,25265 39875,25165 39875,25065 39820,25010 39810.24,25010 ; 39725,27108.31 39731.69,27115 39775,27115 39875,27015 39875,26915 39820,26860 39810.24,26860 ; 39725,28958.31 39731.69,28965 39775,28965 39875,28865 39875,28765 39820,28710 39810.24,28710 ; 39727.69,25171.69 v1(39775.44,25123.94) ; 39727.69,27021.69 v1(39775.44,26973.94) ; 39727.69,28871.69 v1(39775.44,28823.94) ; 39775,25815 39875,25915 40025,25915 40119.02,25820.98 40225,25820.98 ; 39775,27665 39875,27765 40025,27765 40119.02,27670.98 40225,27670.98 ; 39775,29515 39875,29615 40025,29615 40119.02,29520.98 40225,29520.98 ; 39825,25315 v1(39897,25229) ; 39825,27165 v1(39897,27079) ; 39825,29015 v1(39897,28929) ; 39897.05,25742.95 v1(39975,25665) ; 39897.05,27592.95 v1(39975,27515) ; 39897.05,29442.95 v1(39975,29365) ; v1(39925,24915) 39975,24965 40025,24965 40075,25015 40175,25015 40275,24915 40275,24815 40325,24765 40325,24665 40477,24513 41023,24513 41075,24565 41075,24679.88 41240.12,24845 41240.12,24899.88 41175,24965 41021.36,24965 ; v1(39925,26765) 39975,26815 40025,26815 40075,26865 40175,26865 40275,26765 40275,26665 40325,26615 40325,26515 40477,26363 41023,26363 41075,26415 41075,26529.88 41240.12,26695 41240.12,26749.88 41175,26815 41021.36,26815 ; v1(39925,28615) 39975,28665 40025,28665 40075,28715 40175,28715 40275,28615 40275,28515 40325,28465 40325,28365 40477,28213 41023,28213 41075,28265 41075,28379.88 41240.12,28545 41240.12,28599.88 41175,28665 41021.36,28665 ; 40092.15,25515 40175,25515 40375,25715 40675,25715 40787,25621 40787,25121 40718,25053 40624,25053 40537,24966 ; 40092.15,27365 40175,27365 40375,27565 40675,27565 40787,27471 40787,26971 40718,26903 40624,26903 40537,26816 ; 40092.15,29215 40175,29215 40375,29415 40675,29415 40787,29321 40787,28821 40718,28753 40624,28753 40537,28666 ; 40125,26015 40225,25915 40275,25915 40425,26065 40625,26065 40669,26028 40869,26028 40925,26065 ; 40125,27865 40225,27765 40275,27765 40425,27915 40625,27915 40669,27878 40869,27878 40925,27915 ; 40125,29715 40225,29615 40275,29615 40425,29765 40625,29765 40669,29728 40869,29728 40925,29765 ; 40225,26115 40275,26165 40575,26165 40625,26115 40675,26165 40851.75,26165 ; 40225,27965 40275,28015 40575,28015 40625,27965 40675,28015 40851.75,28015 ; 40225,29815 40275,29865 40575,29865 40625,29815 40675,29865 40851.75,29865 ; 40339.08,25473.1 40354.81,25473.1 ; 40339.08,27323.1 40354.81,27323.1 ; 40339.08,29173.1 40354.81,29173.1 ; 40351.03,25228.97 40397.79,25275.74 40692.93,25275.74 40675,25257.81 v1(40675,25165) ; 40351.03,27078.97 40397.79,27125.74 40692.93,27125.74 40675,27107.81 v1(40675,27015) ; 40351.03,28928.97 40397.79,28975.74 40692.93,28975.74 40675,28957.81 v1(40675,28865) ; 40428.97,25151.03 40411.03,25151.03 40325,25065 40225,25065 40175,25115 ; 40428.97,27001.03 40411.03,27001.03 40325,26915 40225,26915 40175,26965 ; 40428.97,28851.03 40411.03,28851.03 40325,28765 40225,28765 40175,28815 ; 40432.76,25551.05 40425,25558.81 40425,25565 40525,25665 v1(40625,25665) ; 40432.76,27401.05 40425,27408.81 40425,27415 40525,27515 v1(40625,27515) ; 40432.76,29251.05 40425,29258.81 40425,29265 40525,29365 v1(40625,29365) ; 40525,26015 40625,25915 40875,25915 40921.85,25868.15 ; 40525,27865 40625,27765 40875,27765 40921.85,27718.15 ; 40525,29715 40625,29615 40875,29615 40921.85,29568.15 ; 40535,24555 40435,24655 40435,24755 40325,24865 40325,24965 40175,25115 ; 40535,24755 40535,24904.19 ; 40535,24965 40535,24904.19 ; 40535,26405 40435,26505 40435,26605 40325,26715 40325,26815 40175,26965 ; 40535,26605 40535,26754.19 ; 40535,26815 40535,26754.19 ; 40535,28255 40435,28355 40435,28455 40325,28565 40325,28665 40175,28815 ; 40535,28455 40535,28604.19 ; 40535,28665 40535,28604.19 ; 40675,24970.98 40601.79,24970.98 40535,24904.19 ; 40675,26820.98 40601.79,26820.98 40535,26754.19 ; 40675,28670.98 40601.79,28670.98 40535,28604.19 ; 40681.22,24865.24 40875,24865.24 ; 40681.22,26715.24 40875,26715.24 ; 40681.22,28565.24 40875,28565.24 ; 40692.93,25385.98 40441.93,25385.98 40354.81,25473.1 ; 40692.93,27235.98 40441.93,27235.98 40354.81,27323.1 ; 40692.93,29085.98 40441.93,29085.98 40354.81,29173.1 ; v1(40775,24565) 40854.76,24644.76 ; v1(40775,24965) 40781.14,24971.14 40781.14,25015 40781.14,25058.86 ; 40775,25052.72 40862.28,25140 40922.64,25140 ; v1(40775,26415) 40854.76,26494.76 ; v1(40775,26815) 40781.14,26821.14 40781.14,26865 40781.14,26908.86 ; 40775,26902.72 40862.28,26990 40922.64,26990 ; v1(40775,28265) 40854.76,28344.76 ; v1(40775,28665) 40781.14,28671.14 40781.14,28715 40781.14,28758.86 ; 40775,28752.72 40862.28,28840 40922.64,28840 ; 40825,25966.57 40953.25,25966.57 40954.83,25965 41025,25965 41075,25915 41075,25865 41025,25815 40955.34,25815 40907.34,25767 40877,25767 40825,25715 40825,25617.69 40873.24,25569.45 ; 40825,27816.57 40953.25,27816.57 40954.83,27815 41025,27815 41075,27765 41075,27715 41025,27665 40955.34,27665 40907.34,27617 40877,27617 40825,27565 40825,27467.69 40873.24,27419.45 ; 40825,29666.57 40953.25,29666.57 40954.83,29665 41025,29665 41075,29615 41075,29565 41025,29515 40955.34,29515 40907.34,29467 40877,29467 40825,29415 40825,29317.69 40873.24,29269.45 ; 40852.9,26166.15 40907.34,26166.15 ; 40852.9,28016.15 40907.34,28016.15 ; 40852.9,29866.15 40907.34,29866.15 ; 40853,25549.21 40860.53,25556.74 ; 40853,27399.21 40860.53,27406.74 ; 40853,29249.21 40860.53,29256.74 ; 40854,25190.72 40875.2,25190.55 ; 40854,27040.72 40875.2,27040.55 ; 40854,28890.72 40875.2,28890.55 ; 40875,24915 40925,24965 41021.36,24965 ; 40875,26765 40925,26815 41021.36,26815 ; 40875,28615 40925,28665 41021.36,28665 ; 40908.49,26165 40975,26165 41083.5,26056.5 41083.5,26006.39 41166.39,25923.5 ; 40908.49,28015 40975,28015 41083.5,27906.5 41083.5,27856.39 41166.39,27773.5 ; 40908.49,29865 40975,29865 41083.5,29756.5 41083.5,29706.39 41166.39,29623.5 ; 40921.53,25190.19 40875.2,25190.55 ; 40921.53,27040.19 40875.2,27040.55 ; 40921.53,28890.19 40875.2,28890.55 ; 40922.64,25240 v1@40922.64,25305.84 ; 40922.64,27090 v1@40922.64,27155.84 ; 40922.64,28940 v1@40922.64,29005.84 ; 40925,25515 40894,25481 40894,25381 40927,25343 41039,25342 41077.71,25310.5 ; 40925,27365 40894,27331 40894,27231 40927,27193 41039,27192 41077.71,27160.5 ; 40925,29215 40894,29181 40894,29081 40927,29043 41039,29042 41077.71,29010.5 ; 40925.97,25515 40969.02,25515 ; 40925.97,27365 40969.02,27365 ; 40925.97,29215 40969.02,29215 ; 40975,25619.88 40923.67,25619.88 40873.24,25569.45 ; 40975,25730.12 41040.12,25730.12 v1(41075,25765) ; 40975,27469.88 40923.67,27469.88 40873.24,27419.45 ; 40975,27580.12 41040.12,27580.12 v1(41075,27615) ; 40975,29319.88 40923.67,29319.88 40873.24,29269.45 ; 40975,29430.12 41040.12,29430.12 v1(41075,29465) ; 40979.88,25615 41075,25615 41125,25565 41125,25465 41198,25398 41228,25371 41270,25327 41272,25269 41272,25165 41250,25140 41127.36,25140 ; 40979.88,27465 41075,27465 41125,27415 41125,27315 41198,27248 41228,27221 41270,27177 41272,27119 41272,27015 41250,26990 41127.36,26990 ; 40979.88,29315 41075,29315 41125,29265 41125,29165 41198,29098 41228,29071 41270,29027 41272,28969 41272,28865 41250,28840 41127.36,28840 ; 40980.98,25415 41014.6,25415 ; 40980.98,27265 41014.6,27265 ; 40980.98,29115 41014.6,29115 ; v1(41025,24915) 41095,24845 41129.88,24845 ; v1(41025,26765) 41095,26695 41129.88,26695 ; v1(41025,28615) 41095,28545 41129.88,28545 ; v1(41075,25515) 41075,25475.4 41014.6,25415 ; v1(41075,27365) 41075,27325.4 41014.6,27265 ; v1(41075,29215) 41075,29175.4 41014.6,29115 ; v1(41125,25715) 41142.02,25732.02 41217,25732.02 ; v1(41125,27565) 41142.02,27582.02 41217,27582.02 ; v1(41125,29415) 41142.02,29432.02 41217,29432.02 ; 41127.36,25190 41200,25190 ; 41127.36,25240 41127.36,25262.64 41077.71,25310.5 ; 41127.36,27040 41200,27040 ; 41127.36,27090 41127.36,27112.64 41077.71,27160.5 ; 41127.36,28890 41200,28890 ; 41127.36,28940 41127.36,28962.64 41077.71,29010.5 ; 41166.5,25923.5 41225,25865 ; 41166.5,27773.5 41225,27715 ; 41166.5,29623.5 41225,29565 ; 41203,25191 41200,25190 ; 41203,27041 41200,27040 ; 41203,28891 41200,28890 ; 34175,22255 34850,22255 34955,22360 35720,22360 ; 34400,28728.64 34498.72,28827.36 34525,28827.36 34525,28750 34550,28725 34700.79,28725 34745.5,28672.29 ; 34420,26803.64 34518.72,26902.36 34545,26902.36 34545,26825 34570,26800 34720.79,26800 34765.5,26747.29 ; 34455,24838.64 34553.72,24937.36 34580,24937.36 34580,24860 34605,24835 34755.79,24835 34800.5,24782.29 ; 34475,22915 34730,22915 34737.5,22922.5 ; 34505,23515 34520,23505 34520,23515 34505,23515 ; 34550,29575 34550,29580.98 34644.02,29675 34644.02,29580.98 34700,29525 34778.28,29525 34908.1,29395.19 ; 34570,27650 34570,27655.98 34664.02,27750 34664.02,27655.98 34720,27600 34798.28,27600 34928.1,27470.19 ; 34605,25685 34605,25690.98 34699.02,25785 34699.02,25690.98 34755,25635 34833.28,25635 34963.1,25505.19 ; 34625,28550 34650,28525 34700,28525 34850,28675 34850,28735.4 ; 34625.55,28874.8 34625.55,28900.55 34650,28925 34956.21,28925 34991.74,28889.47 ; 34645,26625 34670,26600 34720,26600 34870,26750 34870,26810.4 ; 34645.55,26949.8 34645.55,26975.55 34670,27000 34976.21,27000 35011.74,26964.47 ; 34680,24660 34705,24635 34755,24635 34905,24785 34905,24845.4 ; 34680.55,24984.8 34680.55,25010.55 34705,25035 35011.21,25035 35046.74,24999.47 ; 34991.74,28889.47 35004.45,28876.76 ; 35011.74,26964.47 35024.45,26951.76 ; 35046.74,24999.47 35059.45,24986.76 ; 35577.5,22622.5 35720,22480 35720,22360 ; 36250,28728.64 36348.72,28827.36 36375,28827.36 36375,28750 36400,28725 36550.79,28725 36595.5,28672.29 ; 36270,26803.64 36368.72,26902.36 36395,26902.36 36395,26825 36420,26800 36570.79,26800 36615.5,26747.29 ; 36305,24838.64 36403.72,24937.36 36430,24937.36 36430,24860 36455,24835 36605.79,24835 36650.5,24782.29 ; 36400,29575 36400,29580.98 36494.02,29675 36494.02,29580.98 36550,29525 36628.28,29525 36758.1,29395.19 ; 36415,23170 36505,23170 36655,23020 ; 36420,27650 36420,27655.98 36514.02,27750 36514.02,27655.98 36570,27600 36648.28,27600 36778.1,27470.19 ; 36455,25685 36455,25690.98 36549.02,25785 36549.02,25690.98 36605,25635 36683.28,25635 36813.1,25505.19 ; 36475,28550 36500,28525 36550,28525 36700,28675 36700,28735.4 ; 36475.55,28874.8 36475.55,28900.55 36500,28925 36806.21,28925 36841.74,28889.47 ; 36495,26625 36520,26600 36570,26600 36720,26750 36720,26810.4 ; 36495.55,26949.8 36495.55,26975.55 36520,27000 36826.21,27000 36861.74,26964.47 ; 36530,24660 36555,24635 36605,24635 36755,24785 36755,24845.4 ; 36530.55,24984.8 36530.55,25010.55 36555,25035 36861.21,25035 36896.74,24999.47 ; 36655,23020 36660,23012.5 36655,23005 36655,22885 36595,22825 36595,22690 36715,22570 36715,22300 ; 36715,22300 36880,22300 36955,22375 37210,22375 ; 36841.74,28889.47 36854.45,28876.76 ; 36861.74,26964.47 36874.45,26951.76 ; 36896.74,24999.47 36909.45,24986.76 ; 38100,28728.64 38198.72,28827.36 38225,28827.36 38225,28750 38250,28725 38400.79,28725 38445.5,28672.29 ; 38120,26803.64 38218.72,26902.36 38245,26902.36 38245,26825 38270,26800 38420.79,26800 38465.5,26747.29 ; 38155,24838.64 38253.72,24937.36 38280,24937.36 38280,24860 38305,24835 38455.79,24835 38500.5,24782.29 ; 38250,29575 38250,29580.98 38344.02,29675 38344.02,29580.98 38400,29525 38478.28,29525 38608.1,29395.19 ; 38270,27650 38270,27655.98 38364.02,27750 38364.02,27655.98 38420,27600 38498.28,27600 38628.1,27470.19 ; 38305,25685 38305,25690.98 38399.02,25785 38399.02,25690.98 38455,25635 38533.28,25635 38663.1,25505.19 ; 38325,28550 38350,28525 38400,28525 38550,28675 38550,28735.4 ; 38325.55,28874.8 38325.55,28900.55 38350,28925 38656.21,28925 38691.74,28889.47 ; 38345,26625 38370,26600 38420,26600 38570,26750 38570,26810.4 ; 38345.55,26949.8 38345.55,26975.55 38370,27000 38676.21,27000 38711.74,26964.47 ; 38380,24660 38405,24635 38455,24635 38605,24785 38605,24845.4 ; 38380.55,24984.8 38380.55,25010.55 38405,25035 38711.21,25035 38746.74,24999.47 ; 38691.74,28889.47 38704.45,28876.76 ; 38711.74,26964.47 38724.45,26951.76 ; 38746.74,24999.47 38759.45,24986.76 ; 40175,25115 40169.02,25115 40075,25209.02 40169.02,25209.02 40225,25265 40225,25343.28 40354.81,25473.1 ; 40175,26965 40169.02,26965 40075,27059.02 40169.02,27059.02 40225,27115 40225,27193.28 40354.81,27323.1 ; 40175,28815 40169.02,28815 40075,28909.02 40169.02,28909.02 40225,28965 40225,29043.28 40354.81,29173.1 ; 40860.53,25556.74 40825,25521.21 40825,25215 40849.45,25190.55 40875.2,25190.55 ; 40860.53,25556.74 40873.24,25569.45 ; 40860.53,27406.74 40825,27371.21 40825,27065 40849.45,27040.55 40875.2,27040.55 ; 40860.53,27406.74 40873.24,27419.45 ; 40860.53,29256.74 40825,29221.21 40825,28915 40849.45,28890.55 40875.2,28890.55 ; 40860.53,29256.74 40873.24,29269.45 ; 41014.6,25415 41075,25415 41225,25265 41225,25215 41200,25190 ; 41014.6,27265 41075,27265 41225,27115 41225,27065 41200,27040 ; 41014.6,29115 41075,29115 41225,28965 41225,28915 41200,28890 ; 41021.36,24965 40922.64,25063.72 40922.64,25090 41000,25090 41025,25115 41025,25265.79 41077.71,25310.5 ; 41021.36,26815 40922.64,26913.72 40922.64,26940 41000,26940 41025,26965 41025,27115.79 41077.71,27160.5 ; 41021.36,28665 40922.64,28763.72 40922.64,28790 41000,28790 41025,28815 41025,28965.79 41077.71,29010.5
  Top Layer w32: 39249.87,23930.22 39190.87,23871.22 39103.75,23871.22 39003.87,23771.35 39003.87,22881.35 38998.87,22876.35 38998.87,22132.78 39087.54,22044.11 39577.96,22044.11 39659.87,22126.02 39659.87,22135.22 ; 39719.87,23495.22 39719.87,23475.22 39674.87,23430.22 39674.87,22725.22 39799.87,22600.22 39759.87,22640.22 ; 39759.87,22135.22 39829.87,22135.22 39859.87,22165.22 39859.87,22170.22 40434.87,22170.22 40438.87,22166.22 40617.87,22345.22 41139.87,22345.22 41139.87,22445.22 41134.87,22450.22 ; 39966.87,23011.22 39869.87,23108.22 39869.87,23225.22 39969.87,23325.22 39974.87,23325.22 ; 40119.87,22590.22 40119.87,22740.22 40349.47,22969.82 40349.47,22992.02 ; 40124.87,22250.22 40124.87,22420.22 ; 40229.87,22590.22 40273.87,22634.22 40273.87,22643.42 40424.87,22794.42 40424.87,23205.22 40319.87,23310.22 ; 40269.87,24000.22 40330.87,24061.22 41134.87,24061.22 41150.14,24061.22 41194.87,24016.49 41194.87,23825.22 41149.87,23780.22 41049.87,23780.22 40984.87,23715.22 40984.87,23390.22 40699.87,23105.22 40689.87,23105.22 ; 40424.87,23850.22 40493.87,23781.22 40726,23781.22 40845.87,23661.35 40845.87,23372.12 40689.87,23216.12 40689.87,23205.22 ; 40539.87,22580.22 41026.87,23067.22 41026.87,23326.32 41089.87,23389.32 41089.87,23400.22
  Top Layer w40: 39659.87,22135.22 39659.87,22095.22 39720.69,22034.4 39974.87,22034.21 40024.87,22084.21 40024.87,22105.22